# EAGLE board minusz-end-cap (EAGLE 9.3.0)
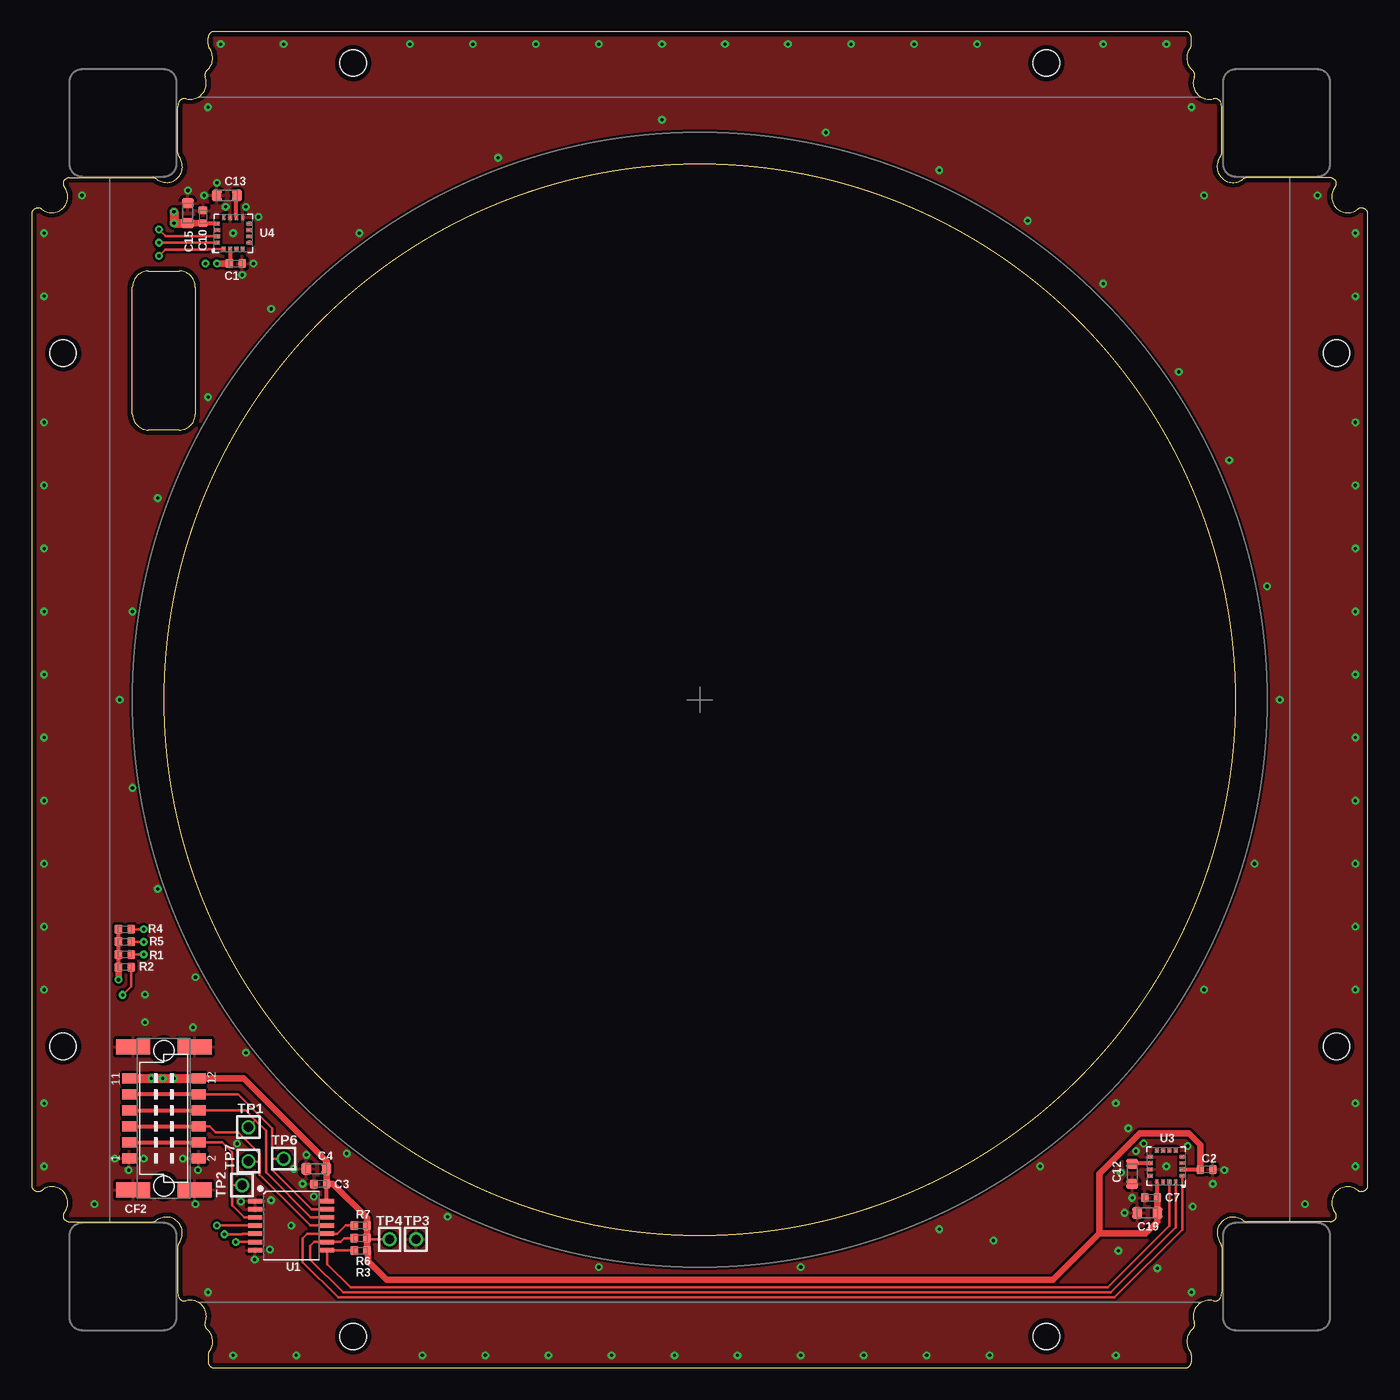
[diagram p0: board, top side]
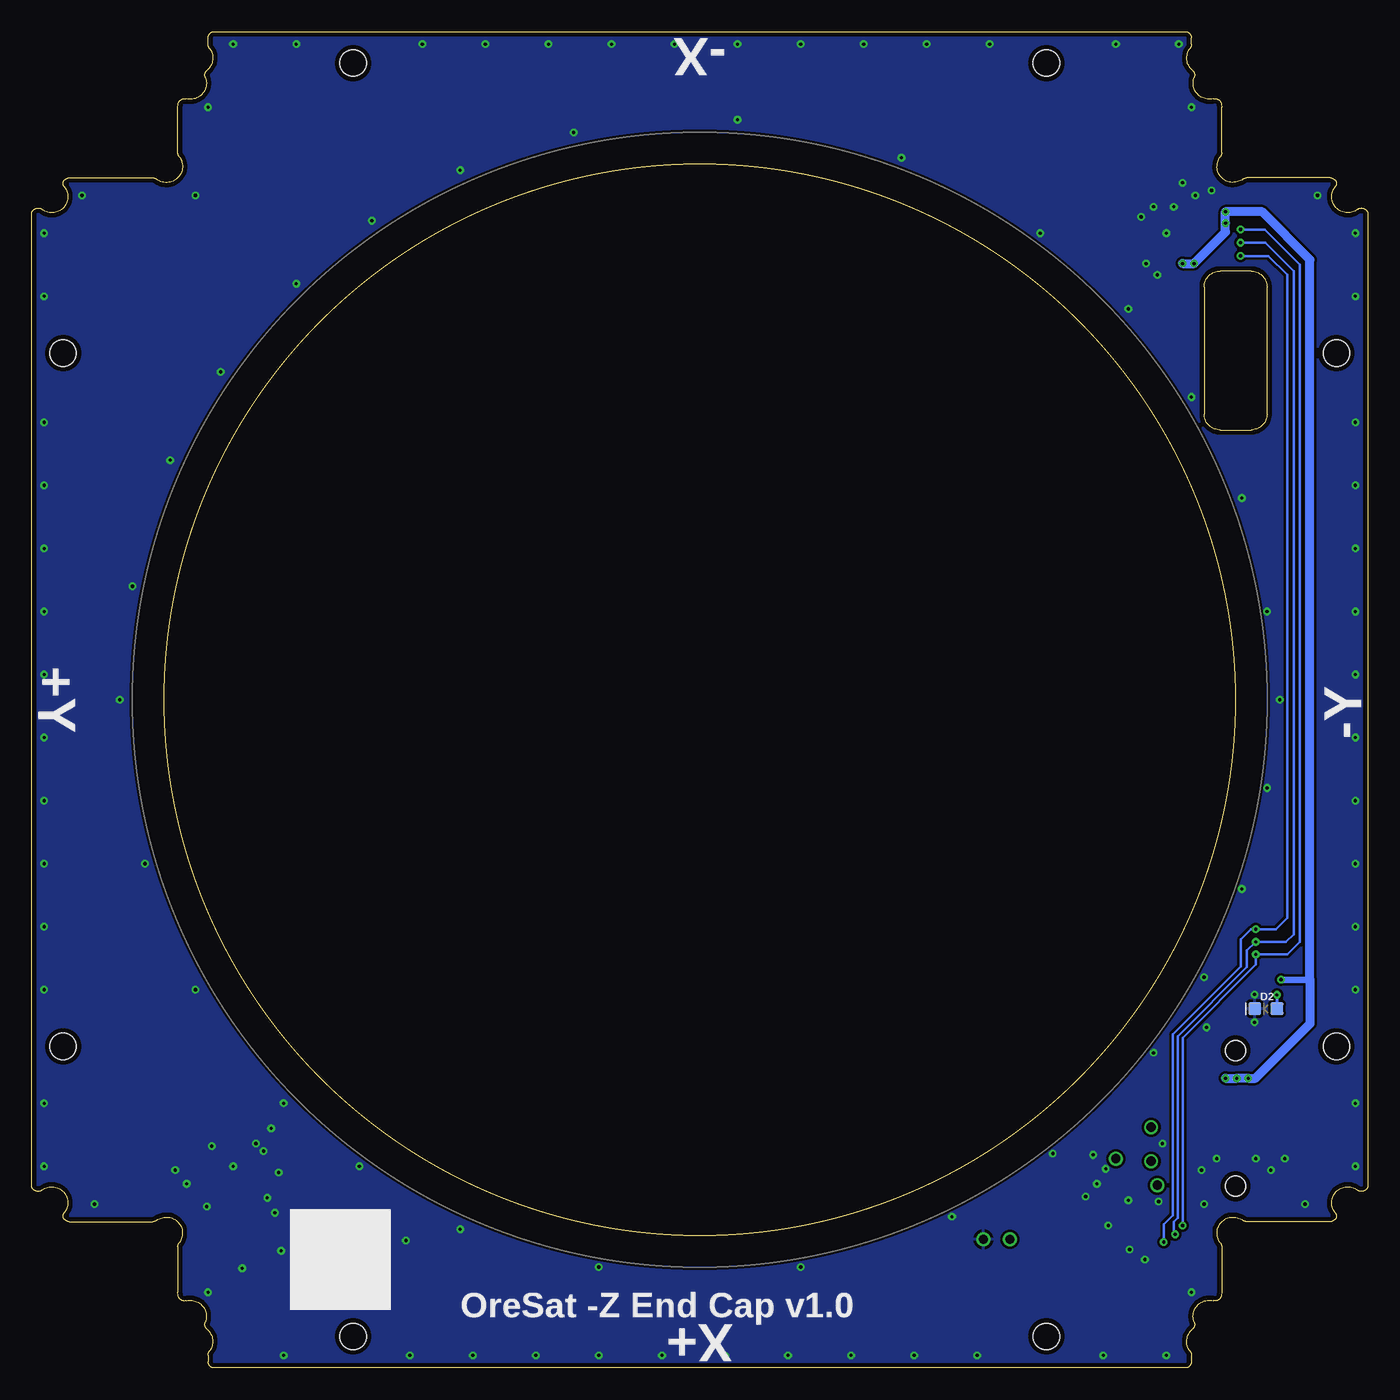
[diagram p1: board, bottom side, seen from below]

Size 106 x 106 mm. Coordinates in mm from the lower left corner, seen from the top.
Outline: 3,94.4 arc85 2.5,93.94 arc33 2.6,93.68 arc-166 0.82,91.89 arc38 0.52,92 0.5,92 arc90 0,91.5 0,14.5 arc90 0.5,14 0.52,14 arc38 0.83,14.11 arc-166 2.6,12.32 arc33 2.5,12.06 arc85 3,11.6 9.62,11.6 arc38 9.92,11.7 arc-166 11.71,9.92 arc38 11.6,9.62 11.6,6 arc22 11.68,5.61 arc83 12.27,5.33 arc-127 13.78,3.63 arc71 13.92,3.07 arc-87 14.11,1.32 arc38 14,1.02 14,0.5 arc90 14.5,0 91.5,0 arc90 92,0.5 92,1.02 arc38 91.9,1.32 arc-87 92.08,3.07 arc71 92.22,3.63 arc-127 93.73,5.33 arc83 94.32,5.61 arc22 94.4,6 94.4,9.62 arc38 94.3,9.92 arc-166 96.08,11.71 arc38 96.38,11.6 103,11.6 arc85 103.5,12.06 arc33 103.39,12.32 arc-166 105.18,14.11 arc38 105.48,14 105.5,14 arc90 106,14.5 106,91.5 arc90 105.5,92 105.48,92 arc38 105.17,91.89 arc-166 103.39,93.68 arc33 103.5,93.94 arc85 103,94.4 96.38,94.4 arc38 96.08,94.29 arc-166 94.3,96.08 arc38 94.4,96.38 94.4,100 arc22 94.32,100.38 arc83 93.73,100.67 arc-127 92.22,102.36 arc71 92.08,102.93 arc-87 91.89,104.68 arc38 92,104.98 92,105.5 arc90 91.5,106 14.5,106 arc90 14,105.5 14,104.98 arc38 14.1,104.68 arc-87 13.92,102.93 arc71 13.78,102.37 arc-127 12.27,100.67 arc83 11.68,100.38 arc22 11.6,100 11.6,96.38 arc38 11.71,96.08 arc-166 9.92,94.3 arc38 9.62,94.4 3,94.4
Outline: 13,85.73 13,75.67 arc-90 11.73,74.4 9.27,74.4 arc-90 8,75.67 8,85.73 arc-90 9.27,87 11.73,87 arc-90 13,85.73
Outline: circle at 53,53 radius 42.5
Copper layers (1*16): Top 0.0356mm / dielectric 1.5011mm / Bottom 0.0356mm
Design rules "OSH-Park-2-layer *": minimum track width 6mil, minimum drill 10mil, track to track 6mil, track to pad 6mil, pad to pad 6mil, via to via 6mil, smd to smd 6mil, copper to edge 15mil, drill to drill 6mil, minimum pad ring 7mil, minimum via ring 7mil, stop-mask expansion 3mil, vias tented up to drill 13mil, thermal gap 10mil
Holes 2.1 mm at 25.5,2.5 2.5,25.5 2.5,80.5 25.5,103.5 80.5,103.5 103.5,80.5 103.5,25.5 80.5,2.5
tRestrict: area 8,8 to 98,98
bRestrict: area 8,8 to 98,98

## Footprints (pad centres in the part's own frame; a part is rotated, then mirrored left to right if it is on the bottom)
.0402-B-NOSILK = smd 0.6 x 0.7: 1 -0.5,0; 2 0.5,0
.0603-B-NOSILK = smd 0.8 x 0.95: 1 -0.8,0; 2 0.8,0
HARWIN-M55-70X1242R = smd 0.8 x 1.1: 1 3.175,-2.75; 2 3.175,2.75; 3 1.905,-2.75; 4 1.905,2.75; 5 0.635,-2.75; 6 0.635,2.75; 7 -0.635,-2.75; 8 -0.635,2.75; 9 -1.905,-2.75; 10 -1.905,2.75; 11 -3.175,-2.75; 12 -3.175,2.75 | smd 1.2 x 2.7: P$1 -5.67,-2.45; P$2 -5.67,2.45; P$3 5.67,2.45; P$4 5.67,-2.45 | hole 1.6: -5.385,0; 5.385,0
LED-0603 = smd 1 x 1: A -0.877,0; C 0.877,0
2MM-TEST-POINT = drill 0.737: 1 0,0
TSSOP14-0.65-5.4X4.4MM = smd 0.35 x 1.1: 1 -1.95,-2.86; 2 -1.3,-2.86; 3 -0.65,-2.86; 4 0,-2.86; 5 0.65,-2.86; 6 1.3,-2.86; 7 1.95,-2.86; 8 1.95,2.86; 9 1.3,2.86; 10 0.65,2.86; 11 0,2.86; 12 -0.65,2.86; 13 -1.3,2.86; 14 -1.95,2.86
QLGA-16(3X3) = smd 0.45 x 0.3: 1 -1.275,0.75; 2 -1.275,0.25; 3 -1.275,-0.25; 4 -1.275,-0.75; 9 1.275,-0.75; 10 1.275,-0.25; 11 1.275,0.25; 12 1.275,0.75 | smd 0.3 x 0.45: 5 -0.75,-1.275; 6 -0.25,-1.275; 7 0.25,-1.275; 8 0.75,-1.275; 13 0.75,1.275; 14 0.25,1.275; 15 -0.25,1.275; 16 -0.75,1.275

## Placement (x,y rotation side)
C1  100n  [.0402-B-NOSILK]  16.2,87.6 0 top
C2  100n  [.0402-B-NOSILK]  93.2,15.75 0 top
C3  100n  [.0402-B-NOSILK]  22.9,14.6 180 top
C4  10u  [.0603-B-NOSILK]  22.6,15.8 180 top
C7  100n  [.0402-B-NOSILK]  88.8,13.5 180 top
C10  100n  [.0402-B-NOSILK]  13.6,91.3 90 top
C12  10u  [.0603-B-NOSILK]  87.3,15.4 270 top
C13  10u  [.0603-B-NOSILK]  15.5,93 180 top
C15  4.7u  [.0603-B-NOSILK]  12.4,91.6 90 top
C19  4.7u  [.0603-B-NOSILK]  88.5,12.3 180 top
CF2  J-HARWIN-M55-70X1242R  [HARWIN-M55-70X1242R]  10.5,19.8 270 top
D2  GREEN  [LED-0603]  8.1,28.5 180 bottom
R1  4.7k  [.0402-B-NOSILK]  7.4,32.8 180 top
R2  2.7k  [.0402-B-NOSILK]  7.4,31.8 180 top
R3  4.7k  [.0402-B-NOSILK]  26.1,9.3 0 top
R4  4.7k  [.0402-B-NOSILK]  7.4,34.8 180 top
R5  4.7k  [.0402-B-NOSILK]  7.4,33.8 180 top
R6  4.7k  [.0402-B-NOSILK]  26.1,10.3 0 top
R7  4.7k  [.0402-B-NOSILK]  26.1,11.3 0 top
TP1  TEST-POINT  [2MM-TEST-POINT]  17.2,19.1 270 top
TP2  TEST-POINT  [2MM-TEST-POINT]  16.7,14.5 0 top
TP3  TEST-POINT  [2MM-TEST-POINT]  30.5,10.2 0 top
TP4  TEST-POINT  [2MM-TEST-POINT]  28.4,10.2 0 top
TP6  TEST-POINT  [2MM-TEST-POINT]  20,16.6 270 top
TP7  TEST-POINT  [2MM-TEST-POINT]  17.2,16.4 0 top
U1  TCA9543A-PW  [TSSOP14-0.65-5.4X4.4MM]  20.6,11.3 270 top
U3  HMC5883L  [QLGA-16(3X3)]  90,16 180 top
U4  HMC5883L  [QLGA-16(3X3)]  16,90 90 top

## Library data of the parts
C1-C3 C7 C10 = rcl_custom; DIS: Digi-Key; DPN: 1276-1001-1-ND; MFR: Samsung; MPN: CL05B104KO5NNNC
C4 C12 C13 C15 C19 = oresat-rcl; DIS: Digi-Key; DPN: 1276-1001-1-ND; MFR: Samsung; MPN: CL05B104KO5NNNC
CF2 = J-Harwin-M55-70X1242R-12pin-1.27mm-M-vertical
D2 = SparkFun-LED; PROD_ID: DIO-00821
R1-R7 = rcl_custom; DIS: Digi-Key; DPN: 1276-4275-1-ND; MFR: Samsung; MPN: RC1005F6653CS
TP1-TP4 TP6 TP7 = Tova
U1 = U-TI-TCA9543A-I2C-2-to-1-multiplexer
U3 U4 = monitor-v2

## Nets
3.3V: C1.1 C2.1 C3.1 C4.1 C7.1 C10.1 C15.1 C19.1 CF2.11 CF2.12 R1.2 R2.2 R3.2 R4.2 R5.2 R6.2 R7.2 TP4.1 U1.14 U3.2 U3.13 U4.2 U4.13
!I2C-RESET: CF2.3 CF2.4 TP2.1 U1.3
!INT0: R1.1 U1.4 U4.15
!INT1: R3.1 U1.8 U3.15
GND: C1.2 C2.2 C3.2 C4.2 C7.2 C10.2 C12.2 C13.2 C15.2 C19.2 CF2.1 CF2.2 CF2.P$1 CF2.P$2 CF2.P$3 CF2.P$4 D2.C TP3.1 U1.1 U1.2 U1.7 U3.9 U3.11 U4.9 U4.11
I2C-!INT: CF2.5 CF2.6 TP7.1 U1.11
I2C-SCL: CF2.7 CF2.8 TP1.1 U1.12
I2C-SDA: CF2.9 CF2.10 TP6.1 U1.13
N$2: C12.1 U3.10
N$5: C13.1 U4.10
N$271: D2.A R2.1
SC1: R7.1 U1.10 U3.1
SCL0: R4.1 U1.6 U4.1
SD1: R6.1 U1.9 U3.16
SDA0: R5.1 U1.5 U4.16

## Tracks (layer width: path | path; a pad name or v marks a point on that pad's centre or on a via)
3.3V  (via drill 0.25)
  Top 0.2: TP4.1 26.7,10.2 R6.2
  Top 0.3: U3.13 89.25,13.55 C7.1 | U3.2 C2.1 | U4.13 13.65,90.75 C10.1 | U4.2 15.75,87.65 C1.1 | R2.2 R1.2 R5.2 R4.2 | U1.14 23.4,13.31 C3.1
  Top 0.5: C7.1 C19.1 89.3,11.6 88.4,10.7 84.7,10.7 | C2.1 92.7,17.7 91.8,18.6 87.9,18.6 84.7,15.4 84.7,10.7 | C15.1 C10.1 | C1.1 v14.7,87.6 | 84.7,10.7 81,7 28.15,7 26.7,8.45 26.7,9.2 R3.2 R6.2 R7.2 26.6,11.9 23.9,14.6 C3.1 C4.1 23.4,16.4 16.82,22.98 CF2.12 | v6.9,30.8 R2.2
  Top 0.7: C15.1 v11.3,90.8 v11.3,91.7 | CF2.11 v9.5,22.98 | CF2.12 v11.3,22.98 9.55,22.98
  Bottom 0.5: 4.6,30.8 v6.9,30.8
  Bottom 0.7: v14.7,87.6 v13.8,87.6 11.3,90.1 v11.3,90.8 v11.3,91.7 8.4,91.7 4.6,87.9 4.6,30.8 4.6,27.3 8.93,22.98 v9.5,22.98 v10.4,22.98 v11.3,22.98
!I2C-RESET
  Top 0.152: TP2.1 15.9,14.5
  Top 0.2: U1.3 16.85,11.95 15.9,12.9 15.9,14.5 15.9,17.1 15.11,17.89 CF2.4
  Top 0.3: CF2.3 CF2.4
!INT0  (via drill 0.25)
  Top 0.2: U4.15 10.65,89.75 v10.1,90.3 | v14.7,11.3 U1.4 | v8.9,32.8 R1.1
  Bottom 0.2: v14.7,11.3 14.7,26.2 8.9,32 v8.9,32.8 6.4,32.8 5.4,33.8 5.4,87.5 8.2,90.3 v10.1,90.3
!INT1
  Top 0.2: U3.15 90.25,11.29 85.36,6.4 74.6,6.4 74.5,6.4 25.3,6.4 23.46,8.24 U1.8 25.55,9.35
  Top 0.3: 25.55,9.35 R3.1
GND  (via drill 0.25)
  other vias: 12.8,27.02 90,16 88.2,17.8 86.4,15.5 87.3,13.5 91.7,17.6 86.7,12.3 86.2,9.3 93.7,14.6 92.1,12.8 89.3,7.9 76.3,10.1 20.6,11.3 21.5,14.6 20.8,15.8 9,29.62 9,27.42 1,16 1,21 1,30 1,35 1,40 1,45 1,50 1,55 1,60 1,65 1,70 1,75 1,90 1,85 105,16 105,21 105,30 105,35 105,40 105,45 105,50 105,55 105,60 105,65 105,70 105,75 105,90 105,85 15,105 20,105 30,105 35,105 40,105 45,105 50,105 55,105 60,105 65,105 70,105 75,105 85,105 90,105 16,1 21,1 31,1 36,1 41,1 46,1 51,1 56,1 61,1 66,1 71,1 76,1 86,1 10,38 10,69 14,77 19,84 26,90 37,96 50,99 63,98 72,95 79,91 85,86 91,79 95,72 98,62 99,53 97,40 93,30 86,21 80,16 72,11 61,8 33,12 25,17 13,31 16,90 17.6,87.6 16.7,86.7 14.7,94 13.7,93 15.4,92.1 12.4,93.4 17,92.1 18,91.3 94.6,15.7 87.6,17.2 4,93 14,100 92,100 93,93 102,93 101,13 92,6 87,19 14,6 13,13 5,13 12,16.6 13.2,15.7 6.6,16.6 7.7,15.7 8.9,16.6 8,60 17,25 45,8 8,46 7,53 17.7,8.6 18.9,9.4 16.6,13.2 16.3,17.8 19,13.3 21.8,16.9 22.4,13.6
  pour Top (isolate 0.2, rank 6): 0,0 106,0 106,106 0,106
  pour Bottom (isolate 0.2, rank 6): 0,0 106,0 106,106 0,106
I2C-!INT
  Top 0.152: TP7.1 18.1,16.4
  Top 0.2: U1.11 22.1,11.3 18.1,15.3 18.1,16.4 18.1,17 16.4,18.7 14.6,18.7 14.13,19.16 CF2.6
  Top 0.3: CF2.5 CF2.6
I2C-SCL
  Top 0.2: U1.12 22.15,11.95 18.6,15.5 18.6,18.8 17.75,19.65 | 17.75,19.65 16.96,20.43 CF2.8 | TP1.1 17.75,19.65
  Top 0.3: CF2.7 CF2.8
I2C-SDA
  Top 0.2: U1.13 22.2,12.6 19.1,15.7 19.1,16.6 | 19.1,16.6 19.1,19 16.39,21.7 CF2.10 | TP6.1 19.1,16.6
  Top 0.3: CF2.10 CF2.9
N$2
  Top 0.2: 87.35,16.25 C12.1
  Top 0.3: U3.10 87.35,16.25
N$5
  Top 0.3: U4.10 16.25,92.95 C13.1
N$271  (via drill 0.25)
  Top 0.2: v7.22,29.59 7.9,30.27 R2.1
  Bottom 0.25: v7.22,29.59 D2.A
SC1
  Top 0.2: U3.1 91.28,10.97 85.9,5.6 24.3,5.6 21.5,8.4 21.5,10.3 21.85,10.65 U1.10 24.25,10.65 24.9,11.3 R7.1
SCL0  (via drill 0.25)
  Top 0.2: U4.1 14.03,88.72 14,88.7 10.6,88.7 v10.1,88.2 | v8.9,34.8 R4.1 | U1.6 v16.2,10 v16.2,9.99
  Bottom 0.2: v16.2,9.99 16.2,11.4 15.48,12.12 15.48,26.46 10.1,31.84 10.1,34 9.3,34.8 v8.9,34.8 7.3,34.8 6.4,35.7 6.4,86.7 7.9,88.2 v10.1,88.2
SD1
  Top 0.2: U3.16 90.75,11.15 85.6,6 74,6 73.9,6 24.7,6 22.1,8.6 22.1,9.7 22.4,10 U1.9 24.5,10 24.8,10.3 R6.1
SDA0  (via drill 0.25)
  Top 0.2: U1.5 16.75,10.65 16.7,10.6 v15.3,10.6 | v10.1,89.25 U4.16 | v8.9,33.8 R5.1
  Bottom 0.2: v15.3,10.6 15.4,10.7 15.4,11.6 15.1,11.9 15.1,26.3 9.6,31.8 9.6,33.1 v8.9,33.8 6.5,33.8 5.9,34.4 5.9,87 8.15,89.25 v10.1,89.25

## Text on the board
bPlace: -X | +Y | -Y | OreSat -Z End Cap v1.0 | +X